# Altium PCB MachIn.PcbDoc
Units mil, origin at the board's own origin, x right, y up, seen from the top; angles counter-clockwise.
Board outline 7225 x 5280 mil, 2 copper layers (Top Layer, Bottom Layer); 48 components, 80 nets, 289 pads, 0 vias.
Unrouted connection lines stored in the file: 182.
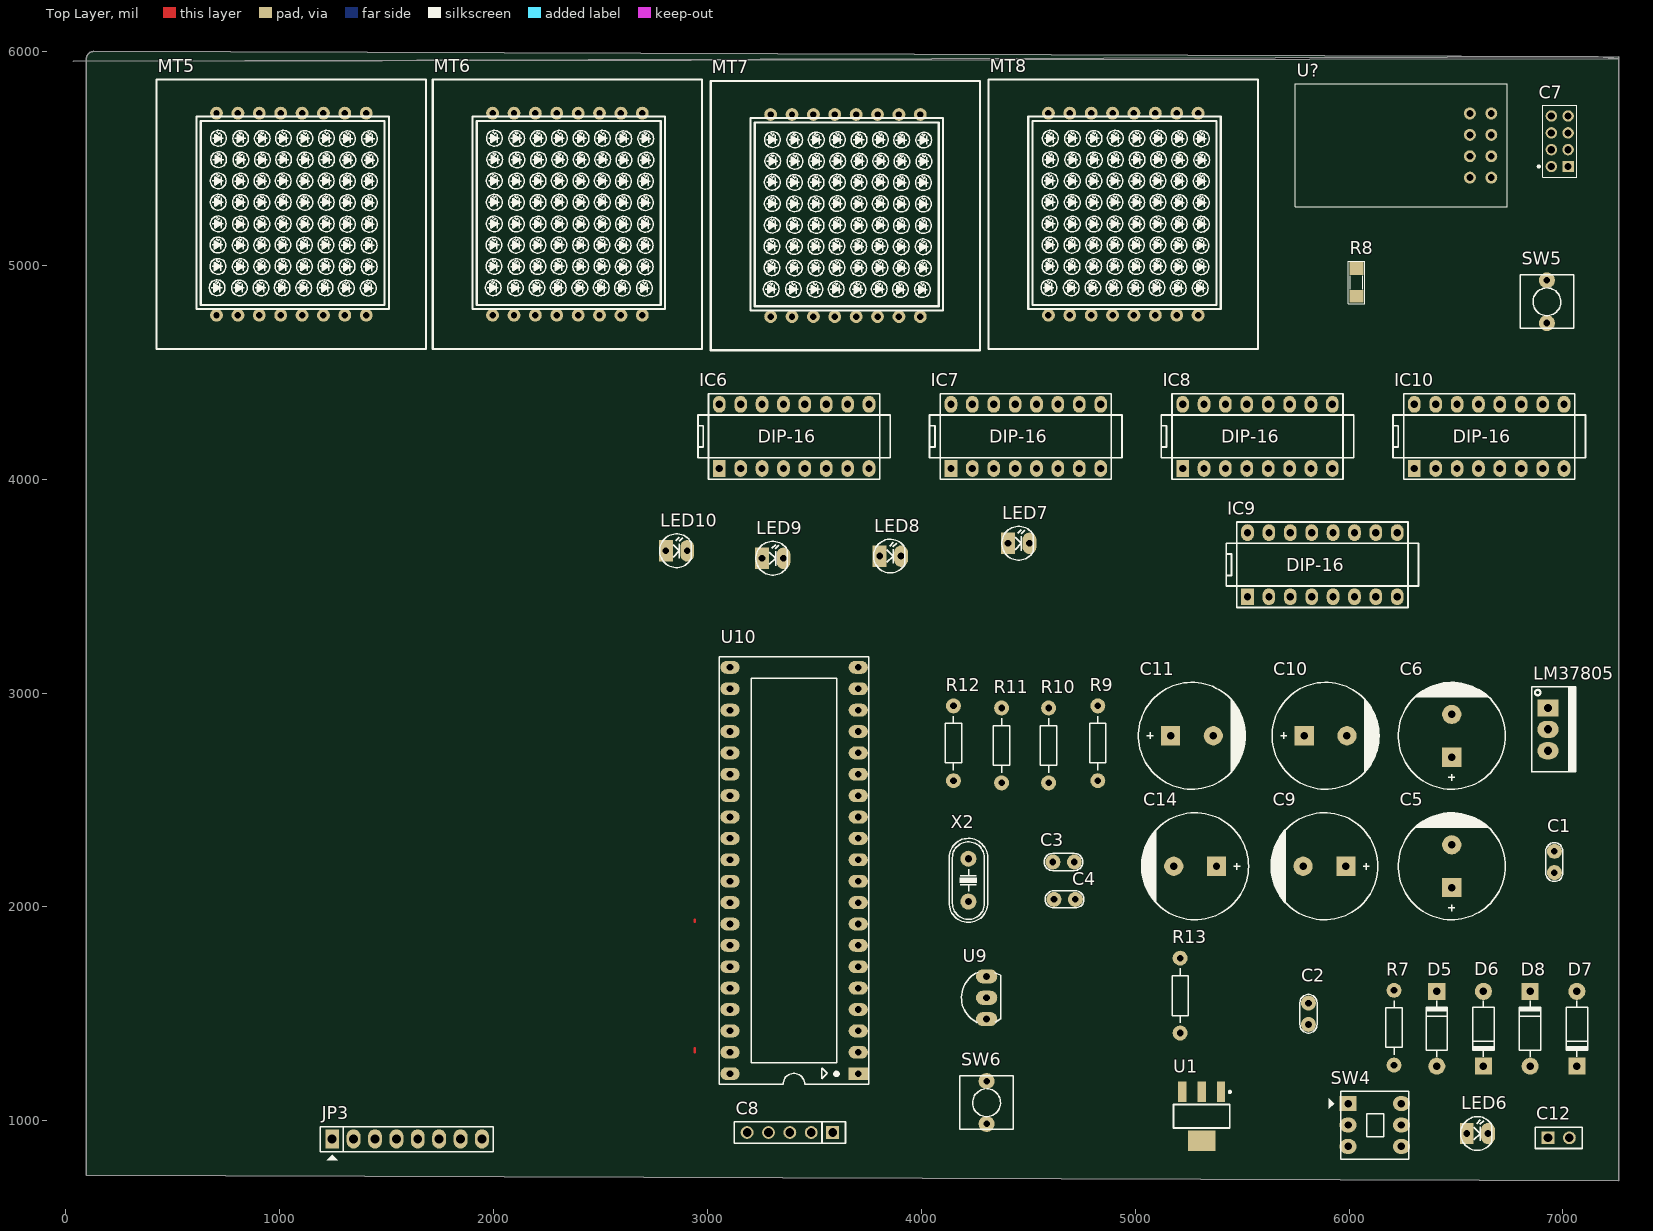
[diagram p0: Top Layer view]
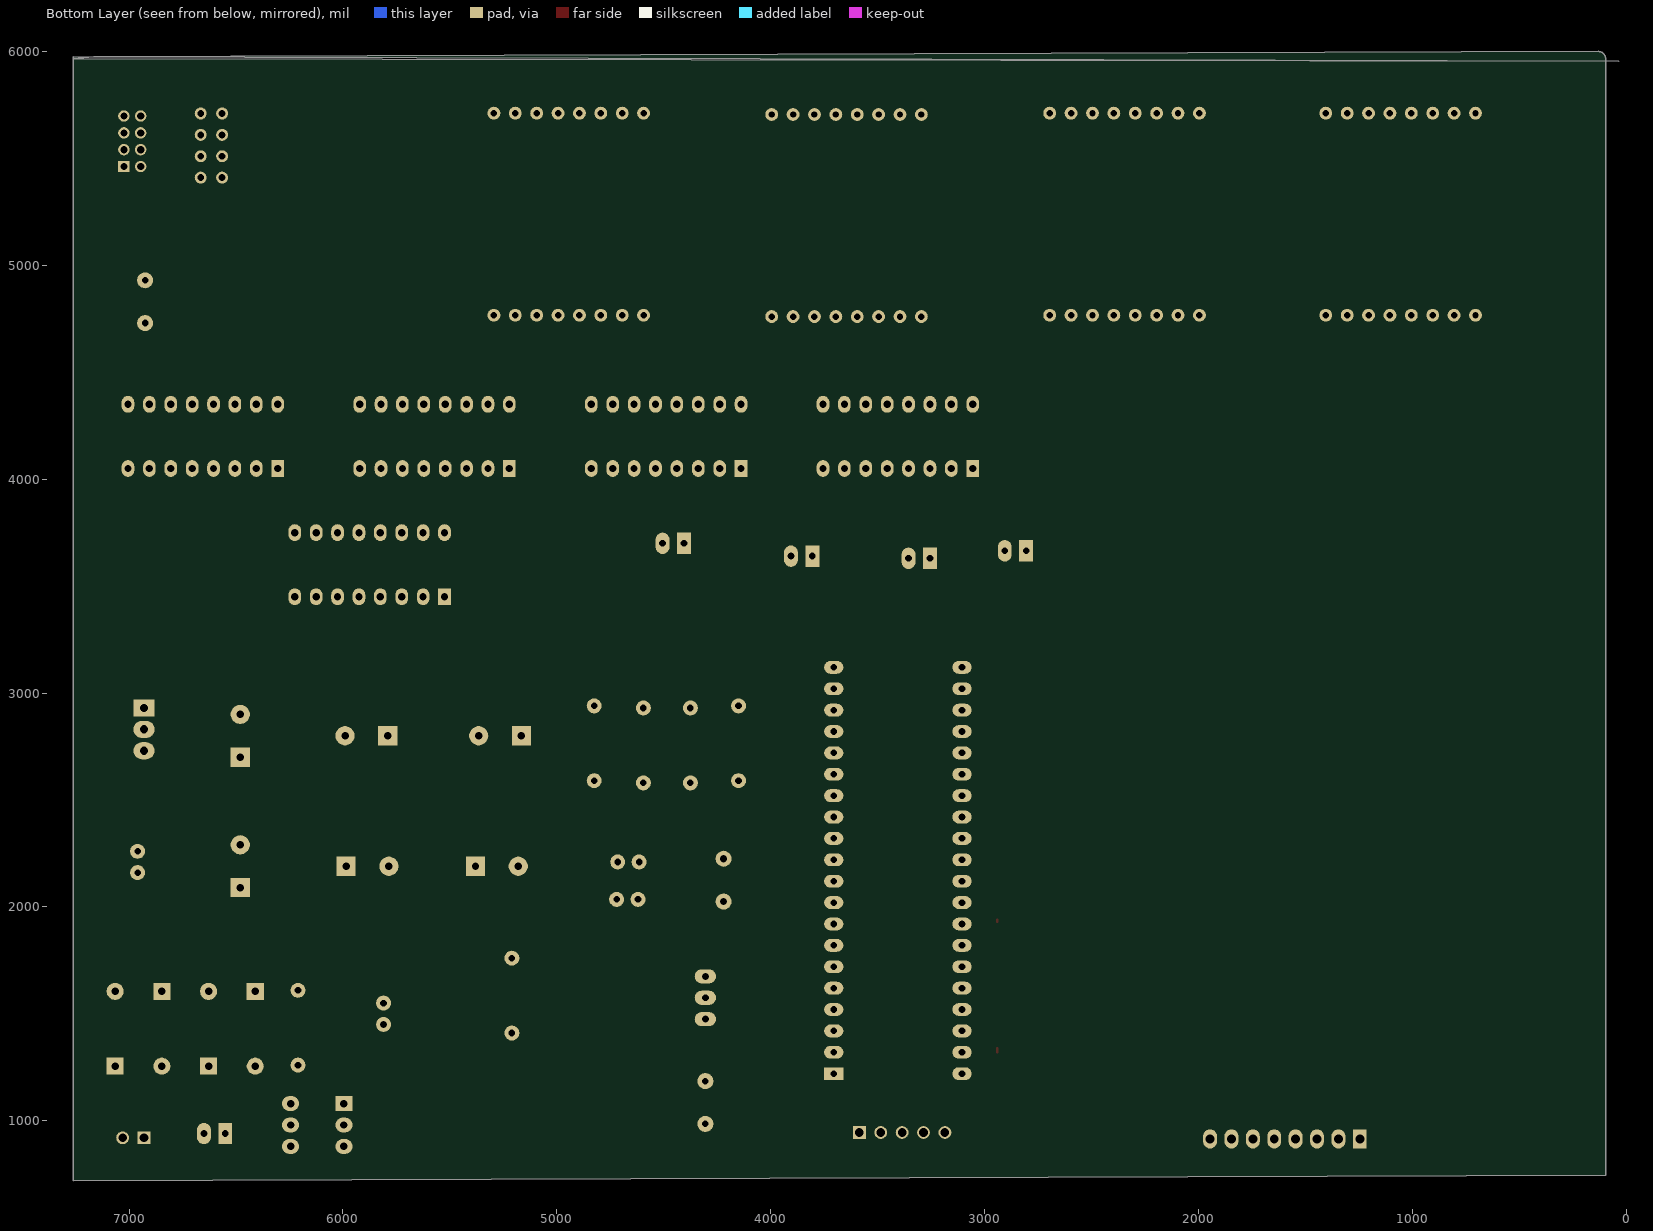
[diagram p1: Bottom Layer view, seen from below]

## Layer stack, top to bottom
Top Solder: solder mask 0.4, Solder Resist, Dk 3.5
Top Layer: signal copper 1.4
Dielectric 1: dielectric 12.6, FR-4, Dk 4.8
Bottom Layer: signal copper 1.4
Bottom Solder: solder mask 0.4, Solder Resist, Dk 3.5

## Board outline
130,6000 ccw(c130,5965) 95,5965 95,745 7260,720 7260,5975 35,5955 7260,5965 7165,5975

## Design rules (kind name [scope] priority, off if disabled: settings)
Clearance [All] p1: gap=10 ignorepadtopadclearanceinfootprint=FALSE except(0: Arc-Hole Track-Hole SMDPad-Hole THPad-Hole Via-Hole Fill-Hole Poly-Hole Region-Hole Text-Hole)
PolygonConnect [All] p1: connectstyle=Relief reliefconductorwidth=10 reliefentries=4 polygonreliefangle="90 Angle" airgapwidth=10
RoutingVias [All] p1: holewidth=28 width=50 viastyle="Through Hole" minholewidth=28 minwidth=50 maxholewidth=28 maxwidth=50
SolderMaskExpansion [All] p1: expansion=4
Width [All] p1: maxlimit=10 minlimit=10 preferedwidth=10
30 further rules are at their usual default settings.

## Components (designator, comment, footprint, x,y, rotation, side; value= is the part's Value field where it differs from the comment)
C1 "100pF" CN1 6960,2260 r270 top
C2 "100pF" CN1 5810,1450 r90 top
C3 "100pF" CN1 4715,2210 r180 top
C4 "100pF" CN1 4720,2035 r180 top
C5 "" CP2/5 6480,2090 r90 top value=1000pF/35V
C6 "" CP2/5 6480,2700 r90 top value=1000pF/35V
C7 "ESP8266" J4-C2T 6985,5580 r90 top
C8 "MACH NAP" JP5-C1T 3585,945 r180 top
C9 "" CP2/5 5985,2190 r180 top value=1000pF/35V
C10 "" CP2/5 5790,2800 r0 top value=1000pF/35V
C11 "" CP2/5 5165,2800 r0 top value=1000pF/35V
C12 "NGUON VAO" JP2-C1T 6930,920 r0 top
C14 "" CP2/5 5380,2190 r180 top value=100uF
D5 "1N4007" D1A 6410,1255 r270 top
D6 "1N4007" D1A 6628.33,1605 r90 top
D7 "1N4007" D1A 7065,1605 r90 top
D8 "1N4007" D1A 6846.67,1255 r270 top
IC6 "74HC595" DIP16 3405.29,4200.08 r0 top
IC7 "74HC595" DIP16 4488.63,4200.08 r0 top
IC8 "74HC595" DIP16 5571.96,4200.08 r0 top
IC9 "74HC595" DIP16 5875.29,3600.08 r0 top
IC10 "74HC595" DIP16 6655.29,4200.08 r0 top
JP3 "KEYPAD 4X4" JP8 1245,915 r0 top value=JP7
LED6 "LED" LED-3 6550,940 r0 top value="LED 3 ly Single Colour"
LED7 "LED" LED-3 4405,3700 r0 top value="LED 3 ly Single Colour"
LED8 "LED" LED-3 3805,3640 r0 top value="LED 3 ly Single Colour"
LED9 "LED" LED-3 3255,3630 r0 top value="LED 3 ly Single Colour"
LED10 "LED" LED-3 2805,3665 r0 top value="LED 3 ly Single Colour"
LM37805 "LM78xx" TO220-123 6930,2930 r270 top
MT5 "Matrix 8x8S" Matrix 1070,5245 r0 top
MT6 "Matrix 8x8S" Matrix 2361,5245 r0 top
MT7 "Matrix 8x8S" Matrix 3661,5238.56 r0 top
MT8 "Matrix 8x8S" Matrix 4960,5245 r0 top
R7 "Res1" R1/4W 6210,1260 r90 top value=1K
R8 "10k" SM-RES-1206 6035,4855 r90 top value="R1/4W - 1K"
R9 "Res1" R1/4W 4825,2590 r90 top value=220
R10 "Res1" R1/4W 4595,2580 r90 top value=220
R11 "Res1" R1/4W 4375,2580 r90 top value=220
R12 "Res1" R1/4W 4150,2590 r90 top value=220
R13 "Res1" R1/4W 5210,1760 r270 top value=10K
SW4 "NUT NGUON" SW6 5995,1080 r0 top value=SW6
SW5 "RESET WIFI" SW2 6925,4730 r90 top value="SW chip 2 pin"
SW6 "NUT RESET" SW2 4305,985 r90 top value="SW chip 2 pin"
U1 "LM1117-3.3V" SOT223 5310.55,1020.83 r180 top
U9 "LM35" TO92-123 4305,1575 r90 top
U10 "PIC16F887-PU" DIP40/W0.6 3705,1220 r90 top
U? "ESP-01" ESP8266 6608,5558 r270 top
X2 "8Mhz" XT2 4220,2125 r90 top value=4Mhz

## Footprints (in the part's own frame and the unit in brackets; to place one, negate y for a bottom-side part, rotate by r counter-clockwise, add the part's x,y. Pads: shape width x height; smd on the part's side, far side on the other; paste and mask are expansions set on the pad)
CN1 [mil]
  round 70 hole 31: 1(0,0) 2(100,0)
  silkscreen extent -40,-40 141,40, body extent -60,-30 170,37, height 265
CP2/5 [mil] "Tu hoa 1000uF/25V,50V"
  rect 90x90 hole 35: 1(0,0)
  round 90 hole 35: 2(200,0)
  silkscreen extent -150,-250 350,250, body extent -142,-246 350,246, height 984
D1A [mil] "Diode 1A, W 100mil, L 350mil"
  round 80 hole 35: 1(0,0)
  rect 80x80 hole 35: 2(-350,0)
  silkscreen extent -305,-50 -45,50, body extent -386,-33 34,36, height 84
DIP16 [mm]
  rect 1.5x2 hole 0.864: 1(-8.897,-3.812)
  oval 1.5x2 hole 0.864: 2(-6.357,-3.812) 3(-3.817,-3.812) 4(-1.277,-3.812) 5(1.263,-3.812) 6(3.803,-3.812) 7(6.343,-3.812) 8(8.883,-3.812) 9(8.883,3.808) 10(6.343,3.808) 11(3.803,3.808) 12(1.263,3.808) 13(-1.277,3.808) 14(-3.817,3.808) 15(-6.357,3.808) 16(-8.897,3.808)
  silkscreen extent -11.44,-5.08 11.42,5.08, body extent -10,-3.93 10,3.94, height 1.99
DIP40/W0.6 [mil] "40 PIN, W 600mil, Pin to pin 100mil"
  rect 60x90 hole 31: 1(0,0)
  oval 60x90 hole 31: 2(100,0) 3(200,0) 4(300,0) 5(400,0) 6(500,0) 7(600,0) 8(700,0) 9(800,0) 10(900,0) 11(1000,0) 12(1100,0) 13(1200,0) 14(1300,0) 15(1400,0) 16(1500,0) 17(1600,0) 18(1700,0) 19(1800,0) 20(1900,0) 21(1900,600) 22(1800,600) 23(1700,600) 24(1600,600) 25(1500,600) 26(1400,600) 27(1300,600) 28(1200,600) 29(1100,600) 30(1000,600) 31(900,600) 32(800,600) 33(700,600) 34(600,600) 35(500,600) 36(400,600) 37(300,600) 38(200,600) 39(100,600) 40(0,600)
  silkscreen extent -50,-50 1950,650, body extent -82,-10 1982,600, height 224
ESP8266 [mil]
  round 56 hole 32: 1(148,57) 2(48,57) 3(-52,57) 4(-152,57) 5(-152,-43) 6(-52,-43) 7(48,-43) 8(148,-43)
  silkscreen extent -290,-860 285,132, body extent -290,-858 281,118, height 566
J4-C2T [mm] "8 pins, dual row, straight, gold plating"
  rect 1.35x1.35 hole 0.85: 1(-3,-1)
  round 1.35 hole 0.85: 2(-1,-1) 3(1,-1) 4(3,-1) 5(3,1) 6(1,1) 7(-1,1) 8(-3,1)
  silkscreen extent -4.25,-2 4.25,2.61, body extent -4.25,-2 4.25,2, height 4.31
JP2-C1T [mm] "2 row, straight, gold plating"
  rect 1.52x1.52 hole 1.02: 1(0,0)
  round 1.52 hole 1.02: 2(2.54,0)
  silkscreen extent -1.52,-1.27 4.06,1.27, body extent -1.52,-1.25 4.06,1.25, height 8.51
JP5-C1T [mm] "5 row, straight, gold plating"
  rect 1.52x1.52 hole 1.02: 1(0,0)
  round 1.52 hole 1.02: 2(2.54,0) 3(5.08,0) 4(7.62,0) 5(10.16,0)
  silkscreen extent -1.52,-1.27 11.68,1.27, body extent -1.52,-1.25 11.68,1.25, height 8.51
JP8 [mil] "JP8"
  rect 65x90 hole 42: 1(0,0)
  oval 65x90 hole 42: 2(100,0) 3(200,0) 4(300,0) 5(400,0) 6(500,0) 7(600,0) 8(700,0)
  silkscreen extent -56,-100 752,57, body extent -48,-50 748,48, height 323
LED-3 [mil] "LED 2 PIN, 3ly Only colour"
  rect 65x100 hole 32: 1(0,0)
  oval 65x100 hole 32: 2(100,0)
  silkscreen extent -29,-78 118,79, body extent -25,-75 113,75, height 217
Matrix [mil]
  round 60 hole 30: 1(-366,-478.44) 2(-266,-478.44) 3(-166,-478.44) 4(-66,-478.44) 5(34,-478.44) 6(134,-478.44) 7(234,-478.44) 8(334,-478.44) 9(334,466.44) 10(234,466.44) 11(134,466.44) 12(34,466.44) 13(-66,466.44) 14(-166,466.44) 15(-266,466.44) 16(-366,466.44)
  silkscreen extent -646,-636 614,624, body extent -645,-635 615,625, height 237
R1/4W [mil] "R 1/4W, 2 Pin, 350mil"
  round 70 hole 31: 1(0,0) 2(350,0)
  silkscreen extent 48,-38 302,38, body extent -40,-47 386,47, height 111
SM-RES-1206 [mil]
  rect 60x65 smd: 1(0,0) 2(130,0)
  silkscreen extent -34,-38 164,39, body extent 2,-31 128,32, height 40
SOT223 [mm]
  rect 1x2.4 smd: 1(-2.3,-2.9) 2(0,-2.9) 3(2.3,-2.9)
  rect 3.3x2.4 smd: 4(0,2.9)
  silkscreen extent -3.48,-3.02 3.35,1.4, body extent -3.25,-3.56 3.25,3.4, height 1.68
SW2 [mil] "SW button 2pin, 250x 250 mil"
  round 75 hole 31: 1(0,0) 2(200,0)
  silkscreen extent -25,-125 225,125
SW6 [mil] "SW DTDP - 6Pin 260x300x300 mil"
  rect 80x70 hole 35: 1(0,0)
  oval 80x70 hole 35: 2(0,-100) 3(0,-200) 4(250,-200) 5(250,-100) 6(250,0)
  silkscreen extent -90,-260 285,58, body extent -33,-259 281,55, height 532
TO92-123 [mil] "TO-92"
  oval 66x100 hole 32: 1(-100,0) 2(0,0) 3(100,0)
  silkscreen extent -117,-65 120,118, body extent -109,-66 109,95, height 245
TO220-123 [mil] "TO-220 - 1-2-3"
  rect 80x100 hole 39: 1(0,0)
  oval 80x100 hole 39: 2(100,0) 3(200,0)
  silkscreen extent -100,-76 300,130, body extent -95,-80 295,97, height 323
XT2 [mil] "Footpin for Crystal 2 pin"
  round 75 hole 34: 1(-100,0) 2(100,0)
  silkscreen extent -198,-90 195,90, body extent -233,-93 213,90, height 138

## Part data
C1 C2 C3 C4: library part CN1, "Cap np  1pF - 472pF"
C5 C6: library part "Cap Pol3_2", "Polarized Capacitor (Surface Mount)", LatestRevisionDate=17-Jul-2002, LatestRevisionNote="Re-released for DXP Platform.", PackageReference=C0805, Publisher="Altium Limited"
C7: library part JP4x2-2.0, "WR-PHD 2.00 mm Dual Pin Header", Manufacturer="Würth Elektronik eiSos GmbH", partNo=62000821121, ComponentLink1 Description=Manufacturer, ComponentLink1URL=http://www.we-online.com, ComponentLink2 Description=Datasheet, ComponentLink2URL=http://katalog.we-online.de/em/datasheet/6200xx21121.pdf, Created by="Karrer Zheng", Created Date="2 April 2013", NoPins=08
C8: library part JP5, "WR-PHD 2.54 mm Angled Socket Header", Manufacturer="Würth Elektronik eiSos GmbH", partNo=613005143121, ComponentLink1 Description=Manufacturer, ComponentLink1URL=http://www.we-online.com, ComponentLink2 Description=Datasheet, ComponentLink2URL=http://katalog.we-online.de/em/datasheet/6130xx143121.pdf, Created by="Karrer Zheng", Created Date="29 March 2013", NoPins=05
C9 C10 C11 C14: library part "Cap Pol3", "Polarized Capacitor (Surface Mount)", LatestRevisionDate=17-Jul-2002, LatestRevisionNote="Re-released for DXP Platform.", PackageReference=C0805, Publisher="Altium Limited"
C12: library part JP2, "WR-PHD 2.54 mm Angled Socket Header", Manufacturer="Würth Elektronik eiSos GmbH", partNo=613002143121, ComponentLink1 Description=Manufacturer, ComponentLink1URL=http://www.we-online.com, ComponentLink2 Description=Datasheet, ComponentLink2URL=http://katalog.we-online.de/em/datasheet/6130xx143121.pdf, Created by="Karrer Zheng", Created Date="29 March 2013", NoPins=02
D5 D6 D7 D8: library part D1A, "Diode 1A"
IC6 IC7 IC8 IC9 IC10: library part 74595, "8 Bit Serial input - Parallel Output"
JP3: library part JP8, "JP8 PIN"
LED6 LED7 LED8 LED9 LED10: "LED Single colour Green and Red"
LM37805: "Positive Voltage Regulator", ComponentLink1Description="Manufacturer Link", ComponentLink1URL=http://www.st.com/, ComponentLink2Description=Datasheet, ComponentLink2URL=http://www.st.com/stonline/products/literature/ds/2146/l78m05c.pdf, DatasheetVersion=Apr-1994, LatestRevisionDate=17-Jul-2002, LatestRevisionNote="Re-released for DXP Platform.", Note="Tab is connected to pin 3 (GND).", PackageDescription="TO, Thru-Hole, Vertical, Heatsink Mounted; 3 In-Line Leads; Pitch 2.54 mm; Pin sequence 1, 3, 2", PackageReference=ISOWATT220AB, PackageVersion=Jul-1998, Published=24-Aug-2001, Publisher="Altium Limited"
MT5 MT6 MT7 MT8: library part "LED 8x8S", "Matrix 8x8,  Single colour"
R7 R9 R10 R11 R12 R13: library part Res1_4, "Resistor", Manufacturer="Generic Components", Class=Passive, Published=08/06/2000, Publisher="Altium Hobart Technology Centre", SubClass=Resistor
R8: library part R, "Resistor 1/4W"
SW4: library part SW6A, "SW-DTDP - 6 Pin"
SW5 SW6: library part SW2, "Switch button 2 pin"
U1: library part LM1117, "800mA Low-Dropout Linear Regulator", Creator="Nguyen Ba Bien", Website=http://group3i.net
U9: "Teminal"
U10: "Flash-Based, 8-Bit CMOS Microcontroller with nanoWatt Technology, 8K (x14-Bit words) Program Memory, 624 Bytes Data Memory, 35 I/O pins, 40-Pin PDIP, Standard VDD Range, Extended Temperature", Supplier Part Number 1=PIC16F887-E/P-ND, ComponentLink1Description=Datasheet, ComponentLink1URL=http://ww1.microchip.com/downloads/en/DeviceDoc/41291F.pdf, ComponentLink2Description="Packaging Specification", ComponentLink2URL=http://www.microchip.com/stellent/groups/techpub_sg/documents/packagingspec/en012702.pdf, ComponentLink3Description="Microchip.com Home", ComponentLink3URL=http://www.microchip.com/, DatasheetVersion="revF, Apr-2009", LatestRevisionDate=02-Dec-2009, LatestRevisionNote="Updated datasheet to version revF, Apr-2009.", PackageDescription="40-Lead Plastic Dual In-Line (P) - 600 mil Body [PDIP]", PackageReference=PDIP600-P40, PackageVersion="revBB, Aug-2009", Published=29-Jan-2009, Publisher="Altium Limited", Supplier 1=Digi-Key, Supplier 2=Farnell, Supplier Part Number 2=1703423
U?: library part ESP8266-01, "ESP-12 Wi-Fi Module"
X2: library part XT2, "Crystal For all Crystal 2pin."

## Nets (pads, with @x,y where several pads share a name; then routed paths per layer and width w, separated by ;. In a path a pad name is that pad's centre, name@x,y a point inside that pad or via, vN(x,y) a via of type N, cw(c..) or ccw(c..) an arc to the next point about the centre after c; other vN are vias at no path point)
3.3V: C7.2 C7.4 R8.2
5VADC: C8.2 C9.1 IC6.10 IC6.16 IC7.10 IC7.16 IC8.10 IC8.16 IC9.10 IC9.16 IC10.10 IC10.16 R13.1 SW4.3 U1.3 U9.1 U10.11 U10.32
ADC: U9.2 U10.2
C01: IC6.15 MT5.13
C02: IC6.1 MT5.3
C03: IC6.2 MT5.4
C04: IC6.3 MT5.10
C05: IC6.4 MT5.6
C06: IC6.5 MT5.11
C07: IC6.6 MT5.15
C08: IC6.7 MT5.16
C11: IC7.15 MT6.13
C12: IC7.1 MT6.3
C13: IC7.2 MT6.4
C14: IC7.3 MT6.10
C15: IC7.4 MT6.6
C16: IC7.5 MT6.11
C17: IC7.6 MT6.15
C18: IC7.7 MT6.16
C21: IC8.15 MT7.13
C22: IC8.1 MT7.3
C23: IC8.2 MT7.4
C24: IC8.3 MT7.10
C25: IC8.4 MT7.6
C26: IC8.5 MT7.11
C27: IC8.6 MT7.15
C28: IC8.7 MT7.16
C31: IC10.15 MT8.13
C32: IC10.1 MT8.3
C33: IC10.2 MT8.4
C34: IC10.3 MT8.10
C35: IC10.4 MT8.6
C36: IC10.5 MT8.11
C37: IC10.6 MT8.15
C38: IC10.7 MT8.16
DS: IC6.14 U10.20
DSrow: IC9.14 U10.27
GND: C1.1 C2.1 C3.1 C4.1 C5.2 C6.2 C7.5 C8.3 C9.2 C10.2 C11.2 C14.2 D7.1 D8.1 IC6.8 IC6.13 IC7.8 IC7.13 IC8.8 IC8.13 IC9.8 IC9.13 IC10.8 IC10.13 LED6.2 LM37805.2 R9.1 R10.1 R11.1 R12.1 SW5.2 SW6.2 U1.1 U9.3 U10.12 U10.31
J1: C8.1 C14.1 R13.2 SW6.1 U10.1
J4: C8.4 JP3.7 U10.39 | length 20
  Top Layer w10: 2940,1320 2940,1340
J5: C8.5 JP3.8 U10.40
K1: JP3.1 U10.33 | length 10
  Top Layer w10: 2940,1930 2940,1940
K2: JP3.2 U10.34
K3: JP3.3 U10.35
K4: JP3.4 U10.36
K5: JP3.5 U10.37
K6: JP3.6 U10.38
LED1: LED7.1 U10.15
LED2: LED8.1 U10.16
LED3: LED9.1 U10.17
LED4: LED10.1 U10.18
NetC1_2: C1.2 C5.1 D5.2 D6.2 LM37805.1
NetC2_2: C2.2 C6.1 LM37805.3 R7.2 SW4.2
NetC3_2: C3.2 U10.14 X2.2
NetC4_2: C4.2 U10.13 X2.1
NetC10_1: C10.1 U1.2
NetC12_1: C12.1 D6.1 D8.2
NetC12_2: C12.2 D5.1 D7.2
NetLED6_1: LED6.1 R7.1
NetLED7_2: LED7.2 R9.2
NetLED8_2: LED8.2 R10.2
NetLED9_2: LED9.2 R11.2
NetLED10_2: LED10.2 R12.2
QH1: IC6.9 IC7.14
QH2: IC7.9 IC8.14
QH3: IC8.9 IC10.14
R1: IC9.15 MT5.5 MT6.5 MT7.5 MT8.5
R2: IC9.1 MT5.2 MT6.2 MT7.2 MT8.2
R3: IC9.2 MT5.7 MT6.7 MT7.7 MT8.7
R4: IC9.3 MT5.1 MT6.1 MT7.1 MT8.1
R5: IC9.4 MT5.12 MT6.12 MT7.12 MT8.12
R6: IC9.5 MT5.8 MT6.8 MT7.8 MT8.8
R7: IC9.6 MT5.14 MT6.14 MT7.14 MT8.14
R8: IC9.7 MT5.9 MT6.9 MT7.9 MT8.9
RST: C7.3 C11.1 R8.1 SW5.1 U?.3
RX: C7.1 U10.26
SH: IC6.11 IC7.11 IC8.11 IC10.11 U10.19
SHrow: IC9.11 U10.22
ST: IC6.12 IC7.12 IC8.12 IC9.12 IC10.12 U10.21
TX: C7.8 U10.25
pads on no net: C7.6 C7.7 IC9.9 IC10.9 SW4.1 SW4.4 SW4.5 SW4.6 U1.4 U10.3 U10.4 U10.5 U10.6 U10.7 U10.8 U10.9 U10.10 U10.23 U10.24 U10.28 U10.29 U10.30 U?.1 U?.2 U?.4 U?.5 U?.6 U?.7 U?.8

## Silkscreen, mask and mechanical layers (free items; w line width, h text height)
Mechanical 15:
  lines w0: 6880,1920 6880,2440
  lines w10: 1340,5818.92 1340,5868.92 2055,5153.92

## Text inside footprints (layer, text, board x,y; h text height)
IC6: Top Overlay "DIP-16" at 3235,4170 h59.05
IC7: Top Overlay "DIP-16" at 4318.33,4170 h59.05
IC8: Top Overlay "DIP-16" at 5401.67,4170 h59.05
IC9: Top Overlay "DIP-16" at 5705,3570 h59.05
IC10: Top Overlay "DIP-16" at 6485,4170 h59.05